# Altium PCB ACH512识别升级仪V1.2_20260608.PcbDoc (part 3 of 6)
Units mil, origin at the board's own origin, x right, y up, seen from the top; angles counter-clockwise.
Board outline 6141.73 x 5401.57 mil, 2 copper layers (Top Layer, Bottom Layer); 157 components, 111 nets, 548 pads, 222 vias.
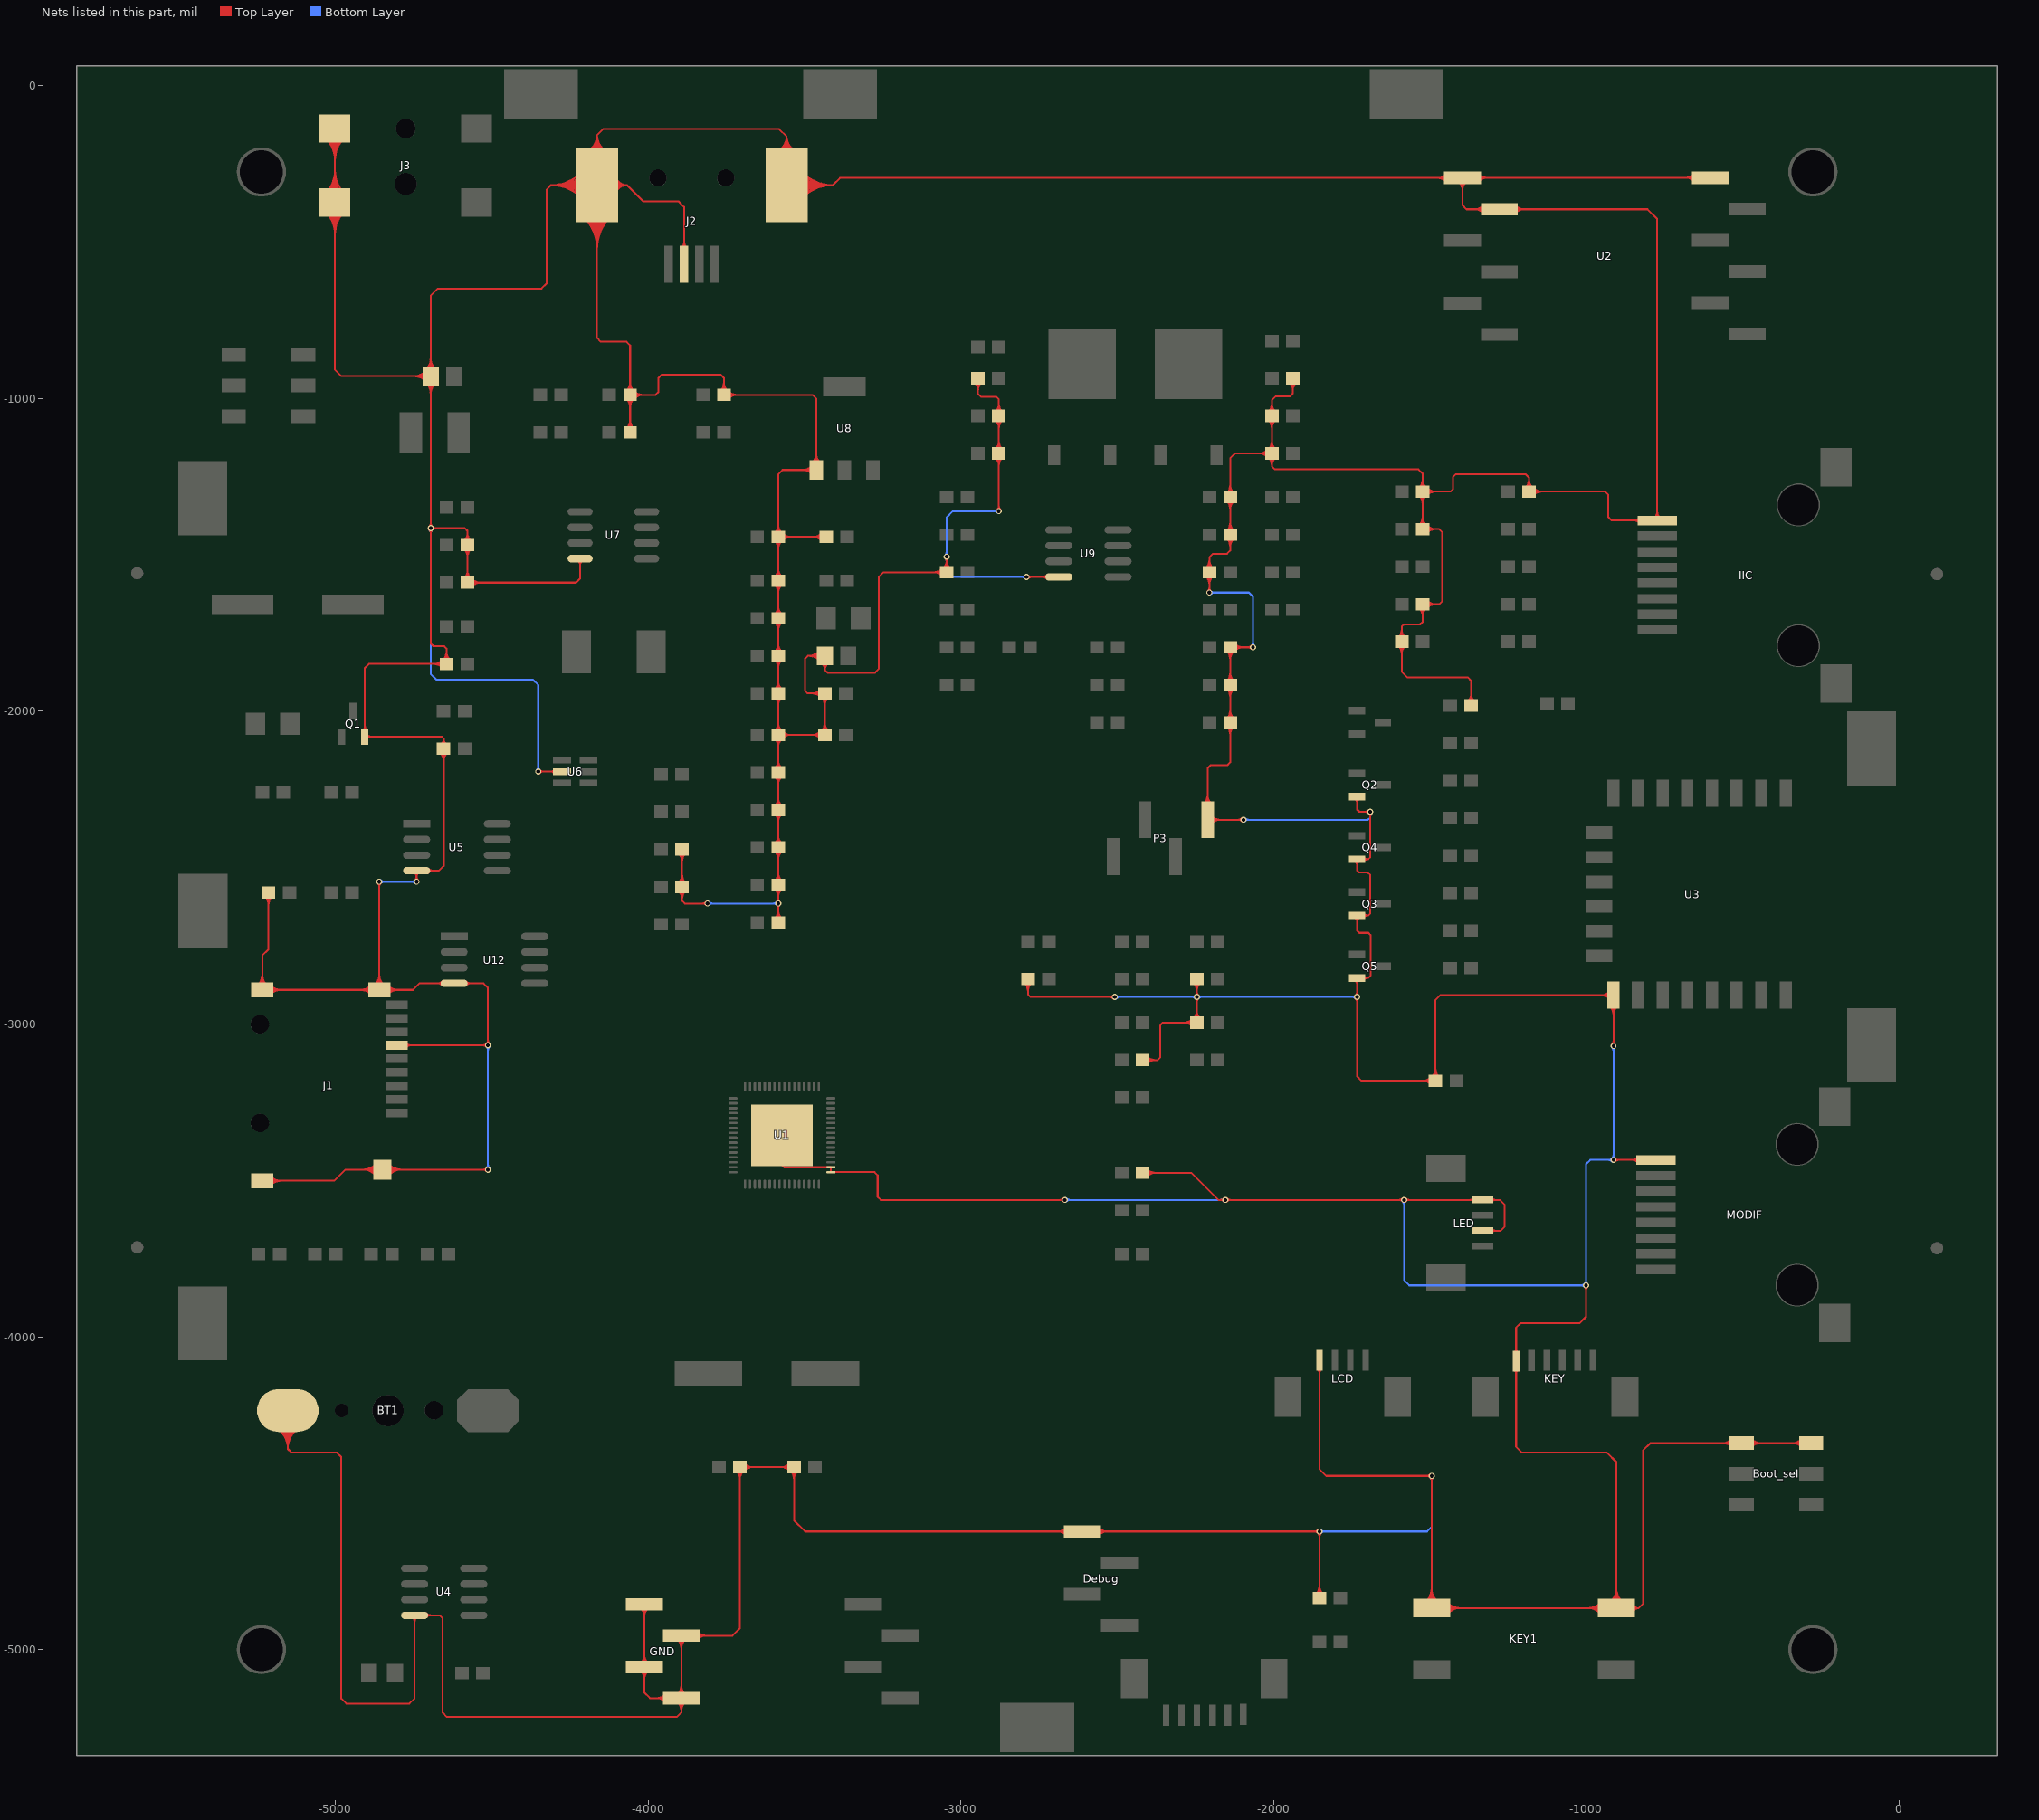
[diagram p3: the nets of this part, all layers, seen from the top]

## Via types
v1: diameter 19.68, hole 11.81, Top Layer to Bottom Layer, 222 vias

## Nets (pads, with @x,y where several pads share a name; then routed paths per layer and width w, separated by ;. In a path a pad name is that pad's centre, name@x,y a point inside that pad or via, vN(x,y) a via of type N, cw(c..) or ccw(c..) an arc to the next point about the centre after c; other vN are vias at no path point) (continued)
GND: (continued)
  Top Layer w6: J1.12@-5247.95,-2876.31 ccw(c-5283.15,-2841.11) -5233.37,-2841.11 ccw(c-5183.59,-2841.11) J1.12@-5218.79,-2876.31 ; J1.12@-5243.71,-2880.55 ccw(c-5268.67,-2855.59) -5233.37,-2855.59 ccw(c-5198.07,-2855.59) J1.12@-5223.03,-2880.55 ; J1.13@-5233.37,-3501.13 -5003.35,-3501.13 -4967.91,-3465.69 J1.10@-4849.52,-3465.69 v1(-4511.81,-3465.69) ; C48.1@-5225.26,-2591.8 cw(c-5253.75,-2620.28) -5213.46,-2620.28 cw(c-5173.18,-2620.28) C48.1@-5201.67,-2591.8 ; C48.1@-5221.02,-2587.56 cw(c-5239.26,-2605.8) -5213.46,-2605.8 cw(c-5187.67,-2605.8) C48.1@-5205.91,-2587.56 ; C48.1@-5213.46,-2580 -5213.46,-2761.46 -5233.37,-2781.37 J1.12@-5233.37,-2890.89 J1.11@-4859.36,-2890.89 ; J1.13@-5211.22,-3511.47 cw(c-5186.26,-3536.43) -5186.26,-3501.13 cw(c-5186.26,-3465.83) J1.13@-5211.22,-3490.79 ; J1.12@-5211.22,-2901.23 cw(c-5186.26,-2926.19) -5186.26,-2890.89 cw(c-5186.26,-2855.59) J1.12@-5211.22,-2880.55 ; J1.13@-5206.97,-3515.71 cw(c-5171.77,-3550.91) -5171.77,-3501.13 cw(c-5171.77,-3451.35) J1.13@-5206.97,-3486.55 ; J1.12@-5206.97,-2905.47 cw(c-5171.77,-2940.67) -5171.77,-2890.89 cw(c-5171.77,-2841.11) J1.12@-5206.97,-2876.31 ; BT1.2@-5188.21,-4290.94 cw(c-5232.89,-4358.52) -5151.87,-4358.52 ; BT1.2@-5184.9,-4285.94 cw(c-5225.51,-4347.36) -5151.87,-4347.36 cw(c-5078.24,-4347.36) BT1.2@-5118.84,-4285.94 ; BT1.2@-5181.6,-4280.93 cw(c-5218.13,-4336.2) -5151.87,-4336.2 cw(c-5085.61,-4336.2) BT1.2@-5122.15,-4280.93 ; BT1.2@-5178.29,-4275.92 cw(c-5210.76,-4325.05) -5151.87,-4325.05 cw(c-5092.99,-4325.05) BT1.2@-5125.46,-4275.92 ; BT1.2@-5174.98,-4270.92 cw(c-5203.38,-4313.89) -5151.87,-4313.89 cw(c-5100.37,-4313.89) BT1.2@-5128.77,-4270.92 ; BT1.2@-5151.87,-4235.97 -5151.87,-4358.53 ; BT1.2@-5115.54,-4290.94 ccw(c-5070.86,-4358.52) -5151.87,-4358.52 ; J3.4@-5030.92,-402.96 cw(c-5103.08,-475.13) -5001.02,-475.13 cw(c-4898.96,-475.13) J3.4@-4971.13,-402.96 ; J3.4@-5030.92,-343.18 ccw(c-5103.08,-271.01) -5001.02,-271.01 ccw(c-4898.96,-271.01) J3.4@-4971.13,-343.18 ; J3.4@-5030.92,-166.74 cw(c-5103.08,-238.91) -5001.02,-238.91 cw(c-4898.96,-238.91) J3.4@-4971.13,-166.74 ; J3.4@-5026.67,-398.72 cw(c-5088.6,-460.65) -5001.02,-460.65 cw(c-4913.44,-460.65) J3.4@-4975.37,-398.72 ; J3.4@-5026.67,-347.42 ccw(c-5088.6,-285.49) -5001.02,-285.49 ccw(c-4913.44,-285.49) J3.4@-4975.37,-347.42 ; J3.4@-5026.67,-162.5 cw(c-5088.6,-224.43) -5001.02,-224.43 cw(c-4913.44,-224.43) J3.4@-4975.37,-162.5 ; J3.4@-5022.43,-394.48 cw(c-5074.11,-446.16) -5001.02,-446.16 cw(c-4927.93,-446.16) J3.4@-4979.61,-394.48 ; J3.4@-5022.43,-351.66 ccw(c-5074.11,-299.98) -5001.02,-299.98 ccw(c-4927.93,-299.98) J3.4@-4979.61,-351.66 ; J3.4@-5022.43,-158.26 cw(c-5074.11,-209.94) -5001.02,-209.94 cw(c-4927.93,-209.94) J3.4@-4979.61,-158.26 ; J3.4@-5018.19,-390.24 cw(c-5059.63,-431.68) -5001.02,-431.68 cw(c-4942.42,-431.68) J3.4@-4983.86,-390.24 ; J3.4@-5018.19,-355.9 ccw(c-5059.63,-314.46) -5001.02,-314.46 ccw(c-4942.42,-314.46) J3.4@-4983.86,-355.9 ; J3.4@-5018.19,-154.02 cw(c-5059.63,-195.46) -5001.02,-195.46 cw(c-4942.42,-195.46) J3.4@-4983.86,-154.02 ; J3.4@-5001.02,-136.85 J3.4@-5001.02,-373.07 -5001.02,-908.38 -4980.81,-928.59 C15.2@-4694.81,-928.59 ; Q1.2@-4911.66,-2061.33 ccw(c-4926.7,-2046.29) -4905.43,-2046.29 ccw(c-4884.16,-2046.29) Q1.2@-4899.2,-2061.33 ; Q1.2@-4899.2,-2087.57 cw(c-4884.16,-2102.61) -4884.16,-2081.34 cw(c-4884.16,-2060.07) Q1.2@-4899.2,-2075.11 ; J1.11@-4885.76,-2905.47 ccw(c-4920.96,-2940.67) -4920.96,-2890.89 ccw(c-4920.96,-2841.11) J1.11@-4885.76,-2876.31 ; J1.11@-4881.51,-2901.23 ccw(c-4906.47,-2926.19) -4906.47,-2890.89 ccw(c-4906.47,-2855.59) J1.11@-4881.51,-2880.55 ; J1.11@-4873.94,-2876.31 ccw(c-4909.14,-2841.11) -4859.36,-2841.11 ccw(c-4809.58,-2841.11) J1.11@-4844.78,-2876.31 ; J1.11@-4869.7,-2880.55 ccw(c-4894.66,-2855.59) -4859.36,-2855.59 ccw(c-4824.06,-2855.59) J1.11@-4849.02,-2880.55 ; J1.10@-4868.28,-3484.45 ccw(c-4913.57,-3529.74) -4913.57,-3465.69 ccw(c-4913.57,-3401.64) J1.10@-4868.28,-3446.93 ; v1@-4864.2,-2549.84 cw(c-4875.88,-2561.52) -4859.36,-2561.52 cw(c-4842.84,-2561.52) v1@-4854.52,-2549.84 ; J1.10@-4864.04,-3480.21 ccw(c-4899.08,-3515.25) -4899.08,-3465.69 ccw(c-4899.08,-3416.13) J1.10@-4864.04,-3451.17 ; J1.10@-4859.79,-3475.96 ccw(c-4884.6,-3500.77) -4884.6,-3465.69 ccw(c-4884.6,-3430.61) J1.10@-4859.79,-3455.42 ; v1(-4859.36,-2545) J1.11@-4859.36,-2890.89 ; J1.10@-4839.25,-3475.96 cw(c-4814.44,-3500.77) -4814.44,-3465.69 cw(c-4814.44,-3430.61) J1.10@-4839.25,-3455.42 ; J1.11@-4837.21,-2901.23 cw(c-4812.25,-2926.19) -4812.25,-2890.89 cw(c-4812.25,-2855.59) J1.11@-4837.21,-2880.55 ; J1.10@-4835,-3480.21 cw(c-4799.96,-3515.25) -4799.96,-3465.69 cw(c-4799.96,-3416.13) J1.10@-4835,-3451.17 ; J1.11@-4832.96,-2905.47 cw(c-4797.76,-2940.67) -4797.76,-2890.89 cw(c-4797.76,-2841.11) J1.11@-4832.96,-2876.31 ; J1.10@-4830.76,-3484.45 cw(c-4785.47,-3529.74) -4785.47,-3465.69 cw(c-4785.47,-3401.64) J1.10@-4830.76,-3446.93 ; J1.6@-4804.24,-3068.05 v1(-4511.81,-3068.05) -4511.81,-2884.19 -4526,-2870 U12.4@-4620,-2870 -4731,-2870 -4751.89,-2890.89 J1.11@-4859.36,-2890.89 ; J1.6@-4774.96,-3075.67 cw(c-4756.56,-3094.08) -4756.56,-3068.05 cw(c-4756.56,-3042.02) J1.6@-4774.96,-3060.43 ; U4.4@-4752.53,-4896.82 cw(c-4767.57,-4911.86) -4746.3,-4911.86 cw(c-4725.03,-4911.86) U4.4@-4740.07,-4896.82 ; U5.4@-4746.23,-2516.23 cw(c-4761.27,-2531.27) -4740,-2531.27 cw(c-4718.73,-2531.27) U5.4@-4733.77,-2516.23 ; v1@-4744.84,-2540.16 ccw(c-4756.52,-2528.48) -4740,-2528.48 ccw(c-4723.48,-2528.48) v1@-4735.16,-2540.16 ; v1(-4740,-2545) U5.4@-4740,-2510 -4669,-2510 -4653.46,-2494.46 C11.2@-4653.46,-2120 -4653.46,-2087.54 ; C15.2@-4710.79,-948.5 cw(c-4749.35,-987.07) -4694.81,-987.07 cw(c-4640.27,-987.07) C15.2@-4678.84,-948.5 ; C15.2@-4710.79,-944.56 ccw(c-4749.35,-983.13) -4749.35,-928.59 ccw(c-4749.35,-874.05) C15.2@-4710.79,-912.62 ; C15.2@-4710.79,-908.68 ccw(c-4749.35,-870.11) -4694.81,-870.11 ccw(c-4640.27,-870.11) C15.2@-4678.84,-908.68 ; U4.4@-4708.57,-4896.82 cw(c-4693.53,-4911.86) -4693.53,-4890.59 cw(c-4693.53,-4869.32) U4.4@-4708.57,-4884.36 ; C15.2@-4706.54,-944.26 cw(c-4734.86,-972.58) -4694.81,-972.58 cw(c-4654.76,-972.58) C15.2@-4683.08,-944.26 ; C15.2@-4706.54,-940.32 ccw(c-4734.86,-968.64) -4734.86,-928.59 ccw(c-4734.86,-888.54) C15.2@-4706.54,-916.86 ; C15.2@-4706.54,-912.92 ccw(c-4734.86,-884.6) -4694.81,-884.6 ccw(c-4654.76,-884.6) C15.2@-4683.08,-912.92 ; U5.4@-4702.27,-2516.23 cw(c-4687.23,-2531.27) -4687.23,-2510 cw(c-4687.23,-2488.73) U5.4@-4702.27,-2503.77 ; v1@-4699.65,-1419.43 cw(c-4711.33,-1431.11) -4694.81,-1431.11 cw(c-4678.29,-1431.11) -4689.97,-1419.43 cw(c-4678.29,-1431.11) -4678.29,-1414.59 cw(c-4678.29,-1398.07) -4689.97,-1409.75 cw(c-4678.29,-1398.07) -4694.81,-1398.07 cw(c-4711.33,-1398.07) v1@-4699.65,-1409.75 ; C11.2@-4665.26,-2131.8 cw(c-4693.75,-2160.28) -4653.46,-2160.28 cw(c-4613.18,-2160.28) C11.2@-4641.67,-2131.8 ; C11.2@-4663.18,-2106.43 ccw(c-4676.7,-2087.54) -4653.46,-2087.54 ; C11.2@-4661.02,-2127.56 cw(c-4679.26,-2145.8) -4653.46,-2145.8 cw(c-4627.67,-2145.8) C11.2@-4645.91,-2127.56 ; C11.2@-4659.68,-2111.31 ccw(c-4668.35,-2099.21) -4653.46,-2099.21 ccw(c-4638.58,-2099.21) C11.2@-4647.25,-2111.31 ; R18.2@-4658.04,-1860.39 ccw(c-4686.52,-1888.87) -4686.52,-1848.59 ccw(c-4686.52,-1808.31) R18.2@-4658.04,-1836.79 ; U12.4@-4657.73,-2876.23 ccw(c-4672.77,-2891.27) -4672.77,-2870 ccw(c-4672.77,-2848.73) U12.4@-4657.73,-2863.77 ; R18.2@-4656.07,-1836.79 ccw(c-4684.56,-1808.31) -4644.27,-1808.31 ccw(c-4603.99,-1808.31) R18.2@-4632.48,-1836.79 ; R18.2@-4653.8,-1856.15 ccw(c-4672.04,-1874.39) -4672.04,-1848.59 ccw(c-4672.04,-1822.79) R18.2@-4653.8,-1841.03 ; R18.2@-4651.83,-1841.03 ccw(c-4670.07,-1822.79) -4644.27,-1822.79 ccw(c-4618.48,-1822.79) R18.2@-4636.72,-1841.03 ; C11.2@-4643.75,-2106.43 cw(c-4630.23,-2087.54) -4653.46,-2087.54 ; C20.2@-4589.14,-1576.79 ccw(c-4617.63,-1548.31) -4577.35,-1548.31 ccw(c-4537.06,-1548.31) C20.2@-4565.55,-1576.79 ; C21.2@-4589.14,-1480.39 cw(c-4617.63,-1508.87) -4577.35,-1508.87 cw(c-4537.06,-1508.87) C21.2@-4565.55,-1480.39 ; C21.2@-4589.14,-1456.79 ccw(c-4617.63,-1428.31) -4577.35,-1428.31 ccw(c-4537.06,-1428.31) C21.2@-4565.55,-1456.79 ; C20.2@-4584.9,-1581.03 ccw(c-4603.14,-1562.79) -4577.35,-1562.79 ccw(c-4551.55,-1562.79) C20.2@-4569.79,-1581.03 ; C21.2@-4584.9,-1476.15 cw(c-4603.14,-1494.39) -4577.35,-1494.39 cw(c-4551.55,-1494.39) C21.2@-4569.79,-1476.15 ; C21.2@-4584.9,-1461.03 ccw(c-4603.14,-1442.79) -4577.35,-1442.79 ccw(c-4551.55,-1442.79) C21.2@-4569.79,-1461.03 ; U12.4@-4582.27,-2876.23 cw(c-4567.23,-2891.27) -4567.23,-2870 cw(c-4567.23,-2848.73) U12.4@-4582.27,-2863.77 ; C20.2@-4567.82,-1596.15 cw(c-4549.58,-1614.39) -4549.58,-1588.59 cw(c-4549.58,-1562.79) C20.2@-4567.82,-1581.03 ; C20.2@-4563.58,-1600.39 cw(c-4535.1,-1628.87) -4535.1,-1588.59 cw(c-4535.1,-1548.31) C20.2@-4563.58,-1576.79 ; v1@-4516.65,-3470.53 ccw(c-4528.33,-3482.21) -4528.33,-3465.69 ccw(c-4528.33,-3449.17) v1@-4516.65,-3460.85 ; v1@-4516.65,-3072.89 ccw(c-4528.33,-3084.57) -4528.33,-3068.05 ccw(c-4528.33,-3051.53) -4516.65,-3063.21 ccw(c-4528.33,-3051.53) -4511.81,-3051.53 ccw(c-4495.29,-3051.53) v1@-4506.97,-3063.21 ; v1(-4351.09,-2192.91) U6.2@-4275.13,-2192.91 ; v1@-4346.25,-2197.75 cw(c-4334.57,-2209.43) -4334.57,-2192.91 cw(c-4334.57,-2176.39) v1@-4346.25,-2188.07 ; U6.2@-4298.38,-2198.45 ccw(c-4311.74,-2211.81) -4311.74,-2192.91 ccw(c-4311.74,-2174.02) U6.2@-4298.38,-2187.38 ; U7.4@-4223.47,-1518.37 cw(c-4238.84,-1533.74) -4217.11,-1533.74 cw(c-4195.38,-1533.74) U7.4@-4210.75,-1518.37 ; U7.4@-4217.11,-1512.01 -4217.11,-1575.89 -4229.81,-1588.59 C20.2@-4577.35,-1588.59 C21.2@-4577.35,-1468.59 -4577.35,-1423.05 -4585.81,-1414.59 v1(-4694.81,-1414.59) ; J2.6@-4209.94,-361.35 ccw(c-4310.01,-454.5) -4310.01,-317.79 ; J2.6@-4209.94,-274.23 cw(c-4310.01,-181.08) -4310.01,-317.79 ; J2.6@-4208.35,-414.97 cw(c-4317.49,-524.1) -4163.15,-524.1 cw(c-4008.81,-524.1) J2.6@-4117.95,-414.97 ; J2.6@-4205.55,-357.27 ccw(c-4296.22,-441.67) -4296.22,-317.79 ccw(c-4296.22,-193.91) J2.6@-4205.55,-278.32 ; J2.6@-4204.11,-410.72 cw(c-4303,-509.62) -4163.15,-509.62 cw(c-4023.3,-509.62) J2.6@-4122.19,-410.72 ; J2.6@-4201.16,-353.18 ccw(c-4282.44,-428.84) -4282.44,-317.79 ccw(c-4282.44,-206.75) J2.6@-4201.16,-282.41 ; J2.6@-4199.87,-406.48 cw(c-4288.52,-495.13) -4163.15,-495.13 cw(c-4037.78,-495.13) J2.6@-4126.43,-406.48 ; J2.6@-4196.77,-349.09 ccw(c-4268.66,-416.01) -4268.66,-317.79 ccw(c-4268.66,-219.58) J2.6@-4196.77,-286.5 ; J2.6@-4195.63,-402.24 cw(c-4274.03,-480.65) -4163.15,-480.65 cw(c-4052.27,-480.65) J2.6@-4130.67,-402.24 ; J2.6@-4193.85,-209.75 ccw(c-4222.23,-157.93) -4163.15,-157.93 ; J2.6@-4192.38,-345 ccw(c-4254.87,-403.18) -4254.87,-317.79 ccw(c-4254.87,-232.41) J2.6@-4192.38,-290.59 ; J2.6@-4191.38,-398 cw(c-4259.55,-466.16) -4163.15,-466.16 cw(c-4066.75,-466.16) J2.6@-4134.92,-398 ; J2.6@-4190.97,-215.02 ccw(c-4216.68,-168.06) -4163.15,-168.06 ccw(c-4109.62,-168.06) J2.6@-4135.33,-215.02 ; J2.6@-4188.09,-220.28 ccw(c-4211.14,-178.19) -4163.15,-178.19 ccw(c-4115.16,-178.19) J2.6@-4138.21,-220.28 ; J2.6@-4187.98,-340.91 ccw(c-4241.09,-390.35) -4241.09,-317.79 ccw(c-4241.09,-245.24) J2.6@-4187.98,-294.68 ; J2.6@-4187.14,-393.75 cw(c-4245.06,-451.67) -4163.15,-451.67 cw(c-4081.24,-451.67) J2.6@-4139.16,-393.75 ; J2.6@-4185.21,-225.54 ccw(c-4205.59,-188.31) -4163.15,-188.31 ccw(c-4120.71,-188.31) J2.6@-4141.09,-225.54 ; J2.6@-4182.9,-389.51 cw(c-4230.58,-437.19) -4163.15,-437.19 cw(c-4095.72,-437.19) J2.6@-4143.4,-389.51 ; J2.6@-4182.33,-230.8 ccw(c-4200.05,-198.44) -4163.15,-198.44 ccw(c-4126.25,-198.44) J2.6@-4143.97,-230.8 ; J2.6@-4132.45,-209.75 cw(c-4104.07,-157.93) -4163.15,-157.93 ; J2.6@-4120.69,-335.31 cw(c-4094.51,-346.12) -4094.51,-317.79 cw(c-4094.51,-289.47) J2.6@-4120.69,-300.27 ; J2.6@-4115.15,-337.6 cw(c-4085.54,-349.82) -4085.54,-317.79 cw(c-4085.54,-285.77) J2.6@-4115.15,-297.98 ; J2.6@-4109.6,-339.89 cw(c-4076.58,-353.52) -4076.58,-317.79 cw(c-4076.58,-282.07) J2.6@-4109.6,-295.7 ; J2.6@-4104.06,-342.18 cw(c-4067.61,-357.22) -4067.61,-317.79 ; J2.6@-4104.06,-293.41 ccw(c-4067.61,-278.37) -4067.61,-317.79 ; C16.2@-4069.14,-1096.79 ccw(c-4097.63,-1068.31) -4057.35,-1068.31 ccw(c-4017.06,-1068.31) C16.2@-4045.55,-1096.79 ; D3.2@-4069.14,-1000.39 cw(c-4097.63,-1028.87) -4057.35,-1028.87 cw(c-4017.06,-1028.87) D3.2@-4045.55,-1000.39 ; D3.2@-4069.14,-976.79 ccw(c-4097.63,-948.31) -4057.35,-948.31 ccw(c-4017.06,-948.31) D3.2@-4045.55,-976.79 ; C16.2@-4064.9,-1101.03 ccw(c-4083.14,-1082.79) -4057.35,-1082.79 ccw(c-4031.55,-1082.79) C16.2@-4049.79,-1101.03 ; D3.2@-4064.9,-996.15 cw(c-4083.14,-1014.39) -4057.35,-1014.39 cw(c-4031.55,-1014.39) D3.2@-4049.79,-996.15 ; D3.2@-4064.9,-981.03 ccw(c-4083.14,-962.79) -4057.35,-962.79 ccw(c-4031.55,-962.79) D3.2@-4049.79,-981.03 ; C16.2@-4057.35,-1108.59 D3.2@-4057.35,-988.59 ; D3.2@-4047.82,-996.15 cw(c-4029.58,-1014.39) -4029.58,-988.59 cw(c-4029.58,-962.79) D3.2@-4047.82,-981.03 ; D3.2@-4043.58,-1000.39 cw(c-4015.1,-1028.87) -4015.1,-988.59 cw(c-4015.1,-948.31) D3.2@-4043.58,-976.79 ; GND.3@-4023.89,-5067.67 cw(c-4053.04,-5096.82) -4011.81,-5096.82 cw(c-3970.58,-5096.82) GND.3@-3999.73,-5067.67 ; GND.3@-4023.89,-5043.51 ccw(c-4053.04,-5014.36) -4011.81,-5014.36 ccw(c-3970.58,-5014.36) GND.3@-3999.73,-5043.51 ; GND.1@-4023.89,-4867.67 cw(c-4053.04,-4896.82) -4011.81,-4896.82 cw(c-3970.58,-4896.82) GND.1@-3999.73,-4867.67 ; GND.3@-4019.64,-5063.42 cw(c-4038.56,-5082.34) -4011.81,-5082.34 cw(c-3985.06,-5082.34) GND.3@-4003.98,-5063.42 ; GND.3@-4019.64,-5047.76 ccw(c-4038.56,-5028.84) -4011.81,-5028.84 ccw(c-3985.06,-5028.84) GND.3@-4003.98,-5047.76 ; GND.1@-4019.64,-4863.42 cw(c-4038.56,-4882.34) -4011.81,-4882.34 cw(c-3985.06,-4882.34) GND.1@-4003.98,-4863.42 ; GND.1@-4011.81,-4855.59 GND.3@-4011.81,-5055.59 -4011.81,-5137.59 -3993.81,-5155.59 GND.4@-3893.7,-5155.59 ; GND.4@-3944.75,-5167.67 ccw(c-3973.91,-5196.82) -3973.91,-5155.59 ccw(c-3973.91,-5114.36) GND.4@-3944.75,-5143.51 ; GND.4@-3940.51,-5163.42 ccw(c-3959.42,-5182.34) -3959.42,-5155.59 ccw(c-3959.42,-5128.84) GND.4@-3940.51,-5147.76 ; GND.4@-3905.78,-5167.67 cw(c-3934.93,-5196.82) -3893.7,-5196.82 cw(c-3852.47,-5196.82) GND.4@-3881.62,-5167.67 ; GND.4@-3905.78,-5143.51 ccw(c-3934.93,-5114.36) -3893.7,-5114.36 ccw(c-3852.47,-5114.36) GND.4@-3881.62,-5143.51 ; GND.2@-3905.78,-4967.67 cw(c-3934.93,-4996.82) -3893.7,-4996.82 cw(c-3852.47,-4996.82) GND.2@-3881.62,-4967.67 ; C10.1@-3903.14,-2573.39 cw(c-3931.63,-2601.87) -3891.35,-2601.87 cw(c-3851.06,-2601.87) C10.1@-3879.55,-2573.39 ; C10.1@-3903.14,-2549.79 ccw(c-3931.63,-2521.31) -3891.35,-2521.31 ccw(c-3851.06,-2521.31) C10.1@-3879.55,-2549.79 ; C12.2@-3903.14,-2453.39 cw(c-3931.63,-2481.87) -3891.35,-2481.87 cw(c-3851.06,-2481.87) C12.2@-3879.55,-2453.39 ; GND.4@-3901.53,-5163.42 cw(c-3920.45,-5182.34) -3893.7,-5182.34 cw(c-3866.95,-5182.34) GND.4@-3885.87,-5163.42 ; GND.4@-3901.53,-5147.76 ccw(c-3920.45,-5128.84) -3893.7,-5128.84 ccw(c-3866.95,-5128.84) GND.4@-3885.87,-5147.76 ; GND.2@-3901.53,-4963.42 cw(c-3920.45,-4982.34) -3893.7,-4982.34 cw(c-3866.95,-4982.34) GND.2@-3885.87,-4963.42 ; C10.1@-3898.9,-2569.15 cw(c-3917.14,-2587.39) -3891.35,-2587.39 cw(c-3865.55,-2587.39) C10.1@-3883.79,-2569.15 ; C10.1@-3898.9,-2554.03 ccw(c-3917.14,-2535.79) -3891.35,-2535.79 ccw(c-3865.55,-2535.79) C10.1@-3883.79,-2554.03 ; C12.2@-3898.9,-2449.15 cw(c-3917.14,-2467.39) -3891.35,-2467.39 cw(c-3865.55,-2467.39) C12.2@-3883.79,-2449.15 ; J2.4@-3892.23,-517.65 ccw(c-3910.63,-499.25) -3884.61,-499.25 ccw(c-3858.58,-499.25) J2.4@-3876.98,-517.65 ; C12.2@-3891.35,-2441.59 C10.1@-3891.35,-2561.59 -3891.35,-2606.05 -3882.81,-2614.59 v1(-3809.81,-2614.59) ; J2.4@-3884.61,-570.55 -3884.61,-387.79 -3902.81,-369.59 -4015.81,-369.59 -4067.61,-317.79 ; GND.2@-3846.89,-4963.42 cw(c-3827.98,-4982.34) -3827.98,-4955.59 cw(c-3827.98,-4928.84) GND.2@-3846.89,-4947.76 ; GND.2@-3842.65,-4967.67 cw(c-3813.49,-4996.82) -3813.49,-4955.59 cw(c-3813.49,-4914.36) GND.2@-3842.65,-4943.51 ; v1@-3814.65,-2619.43 ccw(c-3826.33,-2631.11) -3826.33,-2614.59 ccw(c-3826.33,-2598.07) v1@-3814.65,-2609.75 ; R17.1@-3769.14,-976.79 ccw(c-3797.63,-948.31) -3757.35,-948.31 ccw(c-3717.06,-948.31) R17.1@-3745.55,-976.79 ; R17.1@-3764.9,-981.03 ccw(c-3783.14,-962.79) -3757.35,-962.79 ccw(c-3731.55,-962.79) R17.1@-3749.79,-981.03 ; R17.1@-3747.82,-996.15 cw(c-3729.58,-1014.39) -3729.58,-988.59 cw(c-3729.58,-962.79) R17.1@-3747.82,-981.03 ; R17.1@-3743.58,-1000.39 cw(c-3715.1,-1028.87) -3715.1,-988.59 cw(c-3715.1,-948.31) R17.1@-3743.58,-976.79 ; C1.2@-3718.14,-4428.39 cw(c-3746.63,-4456.87) -3706.35,-4456.87 cw(c-3666.06,-4456.87) C1.2@-3694.55,-4428.39 ; C1.2@-3713.9,-4424.15 cw(c-3732.14,-4442.39) -3706.35,-4442.39 cw(c-3680.55,-4442.39) C1.2@-3698.79,-4424.15 ; C1.2@-3696.82,-4424.15 cw(c-3678.58,-4442.39) -3678.58,-4416.59 cw(c-3678.58,-4390.79) C1.2@-3696.82,-4409.03 ; C1.2@-3692.58,-4428.39 cw(c-3664.1,-4456.87) -3664.1,-4416.59 cw(c-3664.1,-4376.31) C1.2@-3692.58,-4404.79 ; C9.1@-3595.61,-2663.79 ccw(c-3624.09,-2635.31) -3583.81,-2635.31 ccw(c-3543.53,-2635.31) C9.1@-3572.01,-2663.79 ; C8.1@-3595.61,-2567.39 cw(c-3624.09,-2595.87) -3583.81,-2595.87 cw(c-3543.53,-2595.87) C8.1@-3572.01,-2567.39 ; C8.1@-3595.61,-2543.79 ccw(c-3624.09,-2515.31) -3583.81,-2515.31 ccw(c-3543.53,-2515.31) C8.1@-3572.01,-2543.79 ; C14.2@-3595.61,-2447.39 cw(c-3624.09,-2475.87) -3583.81,-2475.87 cw(c-3543.53,-2475.87) C14.2@-3572.01,-2447.39 ; C14.2@-3595.61,-2423.79 ccw(c-3624.09,-2395.31) -3583.81,-2395.31 ccw(c-3543.53,-2395.31) C14.2@-3572.01,-2423.79 ; C13.2@-3595.61,-2327.39 cw(c-3624.09,-2355.87) -3583.81,-2355.87 cw(c-3543.53,-2355.87) C13.2@-3572.01,-2327.39 ; C13.2@-3595.61,-2303.79 ccw(c-3624.09,-2275.31) -3583.81,-2275.31 ccw(c-3543.53,-2275.31) C13.2@-3572.01,-2303.79 ; C5.1@-3595.61,-2207.39 cw(c-3624.09,-2235.87) -3583.81,-2235.87 cw(c-3543.53,-2235.87) C5.1@-3572.01,-2207.39 ; C5.1@-3595.61,-2183.79 ccw(c-3624.09,-2155.31) -3583.81,-2155.31 ccw(c-3543.53,-2155.31) C5.1@-3572.01,-2183.79 ; C4.1@-3595.61,-2087.39 cw(c-3624.09,-2115.87) -3583.81,-2115.87 cw(c-3543.53,-2115.87) C4.1@-3572.01,-2087.39 ; C4.1@-3595.61,-2063.79 ccw(c-3624.09,-2035.31) -3583.81,-2035.31 ccw(c-3543.53,-2035.31) C4.1@-3572.01,-2063.79 ; C22.2@-3595.61,-1954.39 cw(c-3624.09,-1982.87) -3583.81,-1982.87 cw(c-3543.53,-1982.87) C22.2@-3572.01,-1954.39 ; C22.2@-3595.61,-1930.79 ccw(c-3624.09,-1902.31) -3583.81,-1902.31 ccw(c-3543.53,-1902.31) C22.2@-3572.01,-1930.79 ; C23.2@-3595.61,-1834.39 cw(c-3624.09,-1862.87) -3583.81,-1862.87 cw(c-3543.53,-1862.87) C23.2@-3572.01,-1834.39 ; C23.2@-3595.61,-1810.79 ccw(c-3624.09,-1782.31) -3583.81,-1782.31 ccw(c-3543.53,-1782.31) C23.2@-3572.01,-1810.79 ; C24.2@-3595.61,-1714.39 cw(c-3624.09,-1742.87) -3583.81,-1742.87 cw(c-3543.53,-1742.87) C24.2@-3572.01,-1714.39 ; C24.2@-3595.61,-1690.79 ccw(c-3624.09,-1662.31) -3583.81,-1662.31 ccw(c-3543.53,-1662.31) C24.2@-3572.01,-1690.79 ; C25.2@-3595.61,-1594.39 cw(c-3624.09,-1622.87) -3583.81,-1622.87 cw(c-3543.53,-1622.87) C25.2@-3572.01,-1594.39 ; C25.2@-3595.61,-1570.79 ccw(c-3624.09,-1542.31) -3583.81,-1542.31 ccw(c-3543.53,-1542.31) C25.2@-3572.01,-1570.79 ; C26.2@-3595.61,-1454.39 cw(c-3624.09,-1482.87) -3583.81,-1482.87 cw(c-3543.53,-1482.87) C26.2@-3572.01,-1454.39 ; C26.2@-3595.61,-1430.79 ccw(c-3624.09,-1402.31) -3583.81,-1402.31 ccw(c-3543.53,-1402.31) C26.2@-3572.01,-1430.79 ; C9.1@-3591.37,-2668.03 ccw(c-3609.61,-2649.79) -3583.81,-2649.79 ccw(c-3558.02,-2649.8) C9.1@-3576.26,-2668.03 ; C8.1@-3591.37,-2563.15 cw(c-3609.61,-2581.39) -3583.81,-2581.39 cw(c-3558.01,-2581.39) C8.1@-3576.26,-2563.15 ; C8.1@-3591.37,-2548.03 ccw(c-3609.61,-2529.79) -3583.81,-2529.79 ccw(c-3558.01,-2529.79) C8.1@-3576.26,-2548.03 ; C14.2@-3591.37,-2443.15 cw(c-3609.61,-2461.39) -3583.81,-2461.39 cw(c-3558.01,-2461.39) C14.2@-3576.25,-2443.15 ; C14.2@-3591.37,-2428.03 ccw(c-3609.61,-2409.79) -3583.81,-2409.79 ccw(c-3558.01,-2409.79) C14.2@-3576.25,-2428.03 ; C13.2@-3591.37,-2323.15 cw(c-3609.61,-2341.39) -3583.81,-2341.39 cw(c-3558.01,-2341.39) C13.2@-3576.25,-2323.15 ; C13.2@-3591.37,-2308.03 ccw(c-3609.61,-2289.79) -3583.81,-2289.79 ccw(c-3558.01,-2289.79) C13.2@-3576.25,-2308.03 ; C5.1@-3591.37,-2203.15 cw(c-3609.61,-2221.39) -3583.81,-2221.39 cw(c-3558.01,-2221.39) C5.1@-3576.26,-2203.15 ; C5.1@-3591.37,-2188.03 ccw(c-3609.61,-2169.79) -3583.81,-2169.79 ccw(c-3558.01,-2169.79) C5.1@-3576.26,-2188.03 ; C4.1@-3591.37,-2083.15 cw(c-3609.61,-2101.39) -3583.81,-2101.39 ; C4.1@-3591.37,-2068.03 ccw(c-3609.61,-2049.79) -3583.81,-2049.79 ccw(c-3558.02,-2049.8) C4.1@-3576.26,-2068.03 ; C22.2@-3591.37,-1950.15 cw(c-3609.61,-1968.39) -3583.81,-1968.39 cw(c-3558.01,-1968.39) C22.2@-3576.25,-1950.15 ; C22.2@-3591.37,-1935.03 ccw(c-3609.61,-1916.79) -3583.81,-1916.79 ccw(c-3558.01,-1916.79) C22.2@-3576.25,-1935.03 ; C23.2@-3591.37,-1830.15 cw(c-3609.61,-1848.39) -3583.81,-1848.39 cw(c-3558.01,-1848.39) C23.2@-3576.25,-1830.15 ; C23.2@-3591.37,-1815.03 ccw(c-3609.61,-1796.79) -3583.81,-1796.79 ccw(c-3558.01,-1796.79) C23.2@-3576.25,-1815.03 ; C24.2@-3591.37,-1710.15 cw(c-3609.61,-1728.39) -3583.81,-1728.39 cw(c-3558.01,-1728.39) C24.2@-3576.25,-1710.15 ; C24.2@-3591.37,-1695.03 ccw(c-3609.61,-1676.79) -3583.81,-1676.79 ccw(c-3558.01,-1676.79) C24.2@-3576.25,-1695.03 ; C25.2@-3591.37,-1590.15 cw(c-3609.61,-1608.39) -3583.81,-1608.39 cw(c-3558.01,-1608.39) C25.2@-3576.25,-1590.15 ; C25.2@-3591.37,-1575.03 ccw(c-3609.61,-1556.79) -3583.81,-1556.79 ccw(c-3558.01,-1556.79) C25.2@-3576.25,-1575.03 ; C26.2@-3591.37,-1450.15 cw(c-3609.61,-1468.39) -3583.81,-1468.39 cw(c-3558.01,-1468.39) C26.2@-3576.25,-1450.15 ; C26.2@-3591.37,-1435.03 ccw(c-3609.61,-1416.79) -3583.81,-1416.79 ccw(c-3558.01,-1416.79) C26.2@-3576.25,-1435.03 ; v1@-3588.65,-2619.43 cw(c-3600.33,-2631.11) -3583.81,-2631.11 cw(c-3567.29,-2631.11) v1@-3578.97,-2619.43 ; v1@-3588.65,-2609.75 ccw(c-3600.33,-2598.07) -3583.81,-2598.07 ccw(c-3567.29,-2598.07) v1@-3578.97,-2609.75 ; J2.5@-3585.36,-208.6 ccw(c-3608.3,-162.55) -3556.85,-162.55 ; C9.1@-3583.81,-2675.59 C4.1@-3583.81,-2075.59 ; -3583.81,-2101.38 cw(c-3558.02,-2101.38) C4.1@-3576.26,-2083.15 ; J2.5@-3582.68,-213.97 ccw(c-3603.47,-172.25) -3556.85,-172.25 ccw(c-3510.23,-172.25) J2.5@-3531.02,-213.97 ; J2.5@-3580.01,-219.35 ccw(c-3598.64,-181.94) -3556.85,-181.94 ccw(c-3515.06,-181.94) J2.5@-3533.69,-219.35 ; J2.5@-3577.33,-224.72 ccw(c-3593.81,-191.63) -3556.85,-191.63 ccw(c-3519.89,-191.63) J2.5@-3536.37,-224.72 ; C4.1@-3574.29,-2083.15 cw(c-3556.05,-2101.39) -3556.05,-2075.59 cw(c-3556.05,-2049.79) C4.1@-3574.29,-2068.03 ; C26.2@-3574.29,-1450.15 cw(c-3556.05,-1468.39) -3556.05,-1442.59 cw(c-3556.05,-1416.79) C26.2@-3574.29,-1435.03 ; U1.0@-3571.81,-3355.59 -3571.81,-3450.59 -3564.45,-3457.95 U1.34@-3415.31,-3457.95 U1.33@-3415.31,-3473.7 -3275.7,-3473.7 -3265.81,-3483.59 -3265.81,-3552.59 -3256.07,-3562.33 v1(-2667.07,-3562.33) ; C4.1@-3570.04,-2087.39 cw(c-3541.56,-2115.87) -3541.56,-2075.59 cw(c-3541.56,-2035.31) C4.1@-3570.04,-2063.79 ; C26.2@-3570.04,-1454.39 cw(c-3541.56,-1482.87) -3541.56,-1442.59 cw(c-3541.56,-1402.31) C26.2@-3570.04,-1430.79 ; C2.2@-3547.04,-4428.39 ccw(c-3575.52,-4456.87) -3575.52,-4416.59 ccw(c-3575.52,-4376.31) C2.2@-3547.04,-4404.79 ; C2.2@-3545.07,-4428.39 cw(c-3573.56,-4456.87) -3533.27,-4456.87 cw(c-3492.99,-4456.87) C2.2@-3521.48,-4428.39 ; C2.2@-3542.8,-4424.15 ccw(c-3561.04,-4442.39) -3561.04,-4416.59 ccw(c-3561.04,-4390.79) C2.2@-3542.8,-4409.03 ; C2.2@-3540.83,-4424.15 cw(c-3559.07,-4442.39) -3533.27,-4442.39 cw(c-3507.48,-4442.39) C2.2@-3525.72,-4424.15 ; J2.5@-3532.13,-341.03 cw(c-3478.39,-391.54) -3478.39,-317.79 cw(c-3478.39,-244.05) J2.5@-3532.13,-294.56 ; J2.5@-3528.34,-208.6 cw(c-3505.4,-162.55) -3556.85,-162.55 ; J2.5@-3527.76,-345.14 cw(c-3464.52,-404.58) -3464.52,-317.79 cw(c-3464.52,-231.01) J2.5@-3527.76,-290.45 ; J2.5@-3523.38,-349.25 cw(c-3450.65,-417.62) -3450.65,-317.79 cw(c-3450.65,-217.97) J2.5@-3523.38,-286.34 ; J2.5@-3519.01,-353.36 cw(c-3436.77,-430.66) -3436.77,-317.79 cw(c-3436.77,-204.93) J2.5@-3519.01,-282.23 ; J2.5@-3514.64,-357.47 cw(c-3422.9,-443.7) -3422.9,-317.79 cw(c-3422.9,-191.89) J2.5@-3514.64,-278.12 ; J2.5@-3510.27,-361.58 cw(c-3409.02,-456.74) -3409.02,-317.79 ; J2.5@-3510.27,-274.01 ccw(c-3409.02,-178.84) -3409.02,-317.79 ; U8.1@-3475.55,-1241.65 ccw(c-3507.39,-1273.5) -3507.39,-1228.46 ccw(c-3507.39,-1183.43) U8.1@-3475.55,-1215.27 ; U8.1@-3475.55,-1206.42 ccw(c-3507.39,-1174.57) -3462.36,-1174.57 ccw(c-3417.33,-1174.57) U8.1@-3449.17,-1206.42 ; U8.1@-3471.31,-1237.41 ccw(c-3492.91,-1259.01) -3492.91,-1228.46 ccw(c-3492.91,-1197.92) U8.1@-3471.31,-1219.52 ; U8.1@-3471.31,-1210.66 ccw(c-3492.91,-1189.06) -3462.36,-1189.06 ccw(c-3431.81,-1189.06) U8.1@-3453.41,-1210.66 ; C19.2@-3450.73,-1838.48 ccw(c-3488.81,-1876.15) -3488.81,-1822.59 ; C19.2@-3450.73,-1806.7 cw(c-3488.81,-1769.03) -3488.81,-1822.59 ; C7.1@-3448.44,-2087.39 ccw(c-3476.92,-2115.87) -3476.92,-2075.59 ccw(c-3476.92,-2035.31) C7.1@-3448.44,-2063.79 ; C6.1@-3448.44,-1954.39 ccw(c-3476.92,-1982.87) -3476.92,-1942.59 ccw(c-3476.92,-1902.31) C6.1@-3448.44,-1930.79 ; C19.2@-3446.82,-1845.58 cw(c-3460.94,-1867.72) -3434.68,-1867.72 ; C7.1@-3446.47,-2063.79 ccw(c-3474.96,-2035.31) -3434.67,-2035.31 ccw(c-3394.39,-2035.31) C7.1@-3422.88,-2063.79 ; C6.1@-3446.47,-1954.39 cw(c-3474.96,-1982.87) -3434.67,-1982.87 cw(c-3394.39,-1982.87) C6.1@-3422.88,-1954.39 ; C19.2@-3446.47,-1834.26 ccw(c-3474.43,-1861.92) -3474.43,-1822.59 ccw(c-3474.43,-1783.26) C19.2@-3446.47,-1810.92 ; D5.2@-3444.51,-1454.39 ccw(c-3472.99,-1482.87) -3472.99,-1442.59 ccw(c-3472.99,-1402.31) D5.2@-3444.51,-1430.79 ; C7.1@-3444.2,-2083.15 ccw(c-3462.44,-2101.39) -3462.44,-2075.59 ccw(c-3462.44,-2049.79) C7.1@-3444.2,-2068.03 ; C6.1@-3444.2,-1950.15 ccw(c-3462.44,-1968.39) -3462.44,-1942.59 ccw(c-3462.44,-1916.79) C6.1@-3444.2,-1935.03 ; C19.2@-3443.6,-1840.52 cw(c-3453.97,-1856.78) -3434.68,-1856.78 cw(c-3415.39,-1856.78) C19.2@-3425.76,-1840.52 ; C7.1@-3442.23,-2068.03 ccw(c-3460.47,-2049.79) -3434.67,-2049.79 ccw(c-3408.88,-2049.79) C7.1@-3427.12,-2068.03 ; C6.1@-3442.23,-1950.15 cw(c-3460.47,-1968.39) -3434.67,-1968.39 cw(c-3408.88,-1968.39) C6.1@-3427.12,-1950.15 ; D5.2@-3440.26,-1450.15 ccw(c-3458.5,-1468.39) -3458.5,-1442.59 ccw(c-3458.5,-1416.79) D5.2@-3440.26,-1435.03 ; D5.2@-3430.74,-1442.59 C26.2@-3583.81,-1442.59 ; C19.2@-3422.53,-1845.58 ccw(c-3408.41,-1867.72) -3434.68,-1867.72 ; R41.1@-3059.04,-1567.39 ccw(c-3087.52,-1595.87) -3087.52,-1555.59 ccw(c-3087.52,-1515.31) R41.1@-3059.04,-1543.79 ; R41.1@-3057.07,-1543.79 ccw(c-3085.56,-1515.31) -3045.27,-1515.31 ccw(c-3004.99,-1515.31) R41.1@-3033.48,-1543.79 ; R41.1@-3054.8,-1563.15 ccw(c-3073.04,-1581.39) -3073.04,-1555.59 ccw(c-3073.04,-1529.79) R41.1@-3054.8,-1548.03 ; R41.1@-3052.83,-1548.03 ccw(c-3071.07,-1529.79) -3045.27,-1529.79 ccw(c-3019.48,-1529.79) R41.1@-3037.72,-1548.03 ; v1@-3050.11,-1510.89 cw(c-3061.79,-1522.57) -3045.27,-1522.57 cw(c-3028.76,-1522.57) v1@-3040.44,-1510.89 ; v1(-3045.27,-1506.05) R41.1@-3045.27,-1555.59 -3247.59,-1555.59 -3262,-1570 -3262,-1864 -3274.59,-1876.59 -3425.81,-1876.59 -3434.68,-1867.72 ; R55.1@-2957.07,-947.39 cw(c-2985.56,-975.87) -2945.27,-975.87 cw(c-2904.99,-975.87) R55.1@-2933.48,-947.39 ; R55.1@-2952.83,-943.15 cw(c-2971.07,-961.39) -2945.27,-961.39 cw(c-2919.48,-961.39) R55.1@-2937.72,-943.15 ; R55.1@-2945.27,-935.59 -2945.27,-985.13 -2935.81,-994.59 -2886.81,-994.59 -2878.35,-1003.05 C43.2@-2878.35,-1055.59 C44.2@-2878.35,-1175.59 v1(-2878.35,-1360.13) ; C44.2@-2890.14,-1187.39 cw(c-2918.63,-1215.87) -2878.35,-1215.87 cw(c-2838.06,-1215.87) C44.2@-2866.55,-1187.39 ; C44.2@-2890.14,-1163.79 ccw(c-2918.63,-1135.31) -2878.35,-1135.31 ccw(c-2838.06,-1135.31) C44.2@-2866.55,-1163.79 ; C43.2@-2890.14,-1067.39 cw(c-2918.63,-1095.87) -2878.35,-1095.87 cw(c-2838.06,-1095.87) C43.2@-2866.55,-1067.39 ; C43.2@-2890.14,-1043.79 ccw(c-2918.63,-1015.31) -2878.35,-1015.31 ccw(c-2838.06,-1015.31) C43.2@-2866.55,-1043.79 ; C44.2@-2885.9,-1183.15 cw(c-2904.14,-1201.39) -2878.35,-1201.39 cw(c-2852.55,-1201.39) C44.2@-2870.79,-1183.15 ; C44.2@-2885.9,-1168.03 ccw(c-2904.14,-1149.79) -2878.35,-1149.79 ccw(c-2852.55,-1149.79) C44.2@-2870.79,-1168.03 ; C43.2@-2885.9,-1063.15 cw(c-2904.14,-1081.39) -2878.35,-1081.39 cw(c-2852.55,-1081.39) C43.2@-2870.79,-1063.15 ; C43.2@-2885.9,-1048.03 ccw(c-2904.14,-1029.79) -2878.35,-1029.79 ccw(c-2852.55,-1029.79) C43.2@-2870.79,-1048.03 ; v1@-2883.18,-1355.29 ccw(c-2894.86,-1343.61) -2878.35,-1343.61 ccw(c-2861.83,-1343.61) v1@-2873.51,-1355.29 ; R28.1@-2797.07,-2867.39 cw(c-2825.56,-2895.87) -2785.27,-2895.87 cw(c-2744.99,-2895.87) R28.1@-2773.48,-2867.39 ; R28.1@-2792.83,-2863.15 cw(c-2811.07,-2881.39) -2785.27,-2881.39 cw(c-2759.48,-2881.39) R28.1@-2777.72,-2863.15 ; v1(-2789.81,-1570.59) U9.4@-2686.3,-1570.59 ; R28.1@-2785.27,-2855.59 -2785.27,-2905.13 -2776.81,-2913.59 v1(-2507.81,-2913.59) ; v1@-2784.97,-1575.43 cw(c-2773.29,-1587.11) -2773.29,-1570.59 cw(c-2773.29,-1554.07) v1@-2784.97,-1565.75 ; U9.4@-2724.02,-1576.82 ccw(c-2739.07,-1591.86) -2739.07,-1570.59 ccw(c-2739.07,-1549.32) U9.4@-2724.02,-1564.36 ; v1@-2671.91,-3567.17 ccw(c-2683.59,-3578.85) -2683.59,-3562.33 ccw(c-2683.59,-3545.81) v1@-2671.91,-3557.49 ; Debug.4@-2661.97,-4634.79 ccw(c-2691.13,-4663.95) -2691.13,-4622.72 ccw(c-2691.13,-4581.48) Debug.4@-2661.97,-4610.64 ; Debug.4@-2657.73,-4630.55 ccw(c-2676.64,-4649.46) -2676.64,-4622.72 ccw(c-2676.64,-4595.97) Debug.4@-2657.73,-4614.88 ; Debug.4@-2564.11,-4630.55 cw(c-2545.2,-4649.46) -2545.2,-4622.72 cw(c-2545.2,-4595.97) Debug.4@-2564.11,-4614.88 ; Debug.4@-2559.87,-4634.79 cw(c-2530.71,-4663.95) -2530.71,-4622.72 cw(c-2530.71,-4581.48) Debug.4@-2559.87,-4610.64 ; v1@-2512.65,-2918.43 ccw(c-2524.33,-2930.11) -2524.33,-2913.59 ccw(c-2524.33,-2897.07) v1@-2512.65,-2908.75 ; C3.2@-2418.35,-3475.59 -2262.81,-3475.59 -2176.07,-3562.33 v1(-2153.81,-3562.33) LED.4@-1331.58,-3562.33 -1276.07,-3562.33 -1260.81,-3577.59 -1260.81,-3647.59 -1274.05,-3660.83 LED.2@-1331.58,-3660.83 ; R32.1@-2418.35,-3115.59 -2370.81,-3115.59 -2362.81,-3107.59 -2362.81,-3004.59 -2353.81,-2995.59 R35.2@-2245.27,-2995.59 v1(-2245.27,-2913.59) C34.1@-2245.27,-2855.59 ; C3.2@-2408.82,-3483.15 cw(c-2390.58,-3501.39) -2390.58,-3475.59 cw(c-2390.58,-3449.79) C3.2@-2408.82,-3468.03 ; R32.1@-2408.82,-3123.15 cw(c-2390.58,-3141.39) -2390.58,-3115.59 cw(c-2390.58,-3089.79) R32.1@-2408.82,-3108.03 ; C3.2@-2404.58,-3487.39 cw(c-2376.1,-3515.87) -2376.1,-3475.59 cw(c-2376.1,-3435.31) C3.2@-2404.58,-3463.79 ; R32.1@-2404.58,-3127.39 cw(c-2376.1,-3155.87) -2376.1,-3115.59 cw(c-2376.1,-3075.31) R32.1@-2404.58,-3103.79 ; R35.2@-2259.04,-3007.39 ccw(c-2287.52,-3035.87) -2287.52,-2995.59 ccw(c-2287.52,-2955.31) R35.2@-2259.04,-2983.79 ; R35.2@-2257.07,-2983.79 ccw(c-2285.56,-2955.31) -2245.27,-2955.31 ccw(c-2204.99,-2955.31) R35.2@-2233.48,-2983.79 ; C34.1@-2257.07,-2867.39 cw(c-2285.56,-2895.87) -2245.27,-2895.87 cw(c-2204.99,-2895.87) C34.1@-2233.48,-2867.39 ; R35.2@-2254.8,-3003.15 ccw(c-2273.04,-3021.39) -2273.04,-2995.59 ccw(c-2273.04,-2969.79) R35.2@-2254.8,-2988.03 ; R35.2@-2252.83,-2988.03 ccw(c-2271.07,-2969.79) -2245.27,-2969.79 ccw(c-2219.48,-2969.79) R35.2@-2237.72,-2988.03 ; C34.1@-2252.83,-2863.15 cw(c-2271.07,-2881.39) -2245.27,-2881.39 cw(c-2219.48,-2881.39) C34.1@-2237.72,-2863.15 ; v1@-2250.11,-2918.43 cw(c-2261.79,-2930.11) -2245.27,-2930.11 cw(c-2228.76,-2930.11) v1@-2240.44,-2918.43 ; v1@-2250.11,-2908.75 ccw(c-2261.79,-2897.07) -2245.27,-2897.07 ccw(c-2228.76,-2897.07) v1@-2240.44,-2908.75 ; P3.4@-2222.89,-2295.95 ccw(c-2252.04,-2266.79) -2210.81,-2266.79 ccw(c-2169.58,-2266.79) P3.4@-2198.73,-2295.95 ; P3.4@-2218.64,-2300.19 ccw(c-2237.56,-2281.28) -2210.81,-2281.28 ccw(c-2184.06,-2281.28) P3.4@-2202.98,-2300.19 ; R50.1@-2217.07,-1567.39 cw(c-2245.56,-1595.87) -2205.27,-1595.87 cw(c-2164.99,-1595.87) R50.1@-2193.48,-1567.39 ; R50.1@-2217.07,-1543.79 ccw(c-2245.56,-1515.31) -2205.27,-1515.31 ccw(c-2164.99,-1515.31) R50.1@-2193.48,-1543.79 ; R50.1@-2212.83,-1563.15 cw(c-2231.07,-1581.39) -2205.27,-1581.39 cw(c-2179.48,-1581.39) R50.1@-2197.72,-1563.15 ; R50.1@-2212.83,-1548.03 ccw(c-2231.07,-1529.79) -2205.27,-1529.79 ccw(c-2179.48,-1529.79) R50.1@-2197.72,-1548.03 ; v1@-2210.11,-1615.75 ccw(c-2221.79,-1604.07) -2205.27,-1604.07 ccw(c-2188.76,-1604.07) v1@-2200.44,-1615.75 ; v1(-2205.27,-1620.59) R50.1@-2205.27,-1555.59 -2205.27,-1508.05 -2193.81,-1496.59 -2148.81,-1496.59 -2138.35,-1486.13 C37.2@-2138.35,-1435.59 C41.2@-2138.35,-1315.59 -2138.35,-1191.13 -2122.81,-1175.59 C46.2@-2005.27,-1175.59 ; P3.4@-2202.98,-2354.83 cw(c-2184.06,-2373.75) -2184.06,-2347 cw(c-2184.06,-2320.25) P3.4@-2202.98,-2339.17 ; P3.4@-2198.73,-2359.08 cw(c-2169.58,-2388.23) -2169.58,-2347 cw(c-2169.58,-2305.77) P3.4@-2198.73,-2334.92 ; v1@-2158.65,-3567.17 ccw(c-2170.33,-3578.85) -2170.33,-3562.33 ccw(c-2170.33,-3545.81) v1@-2158.65,-3557.49 ; C38.1@-2150.14,-2047.39 cw(c-2178.63,-2075.87) -2138.35,-2075.87 cw(c-2098.06,-2075.87) C38.1@-2126.55,-2047.39 ; C38.1@-2150.14,-2023.79 ccw(c-2178.63,-1995.31) -2138.35,-1995.31 ccw(c-2098.06,-1995.31) C38.1@-2126.55,-2023.79 ; C42.1@-2150.14,-1927.39 cw(c-2178.63,-1955.87) -2138.35,-1955.87 cw(c-2098.06,-1955.87) C42.1@-2126.55,-1927.39 ; C42.1@-2150.14,-1903.79 ccw(c-2178.63,-1875.31) -2138.35,-1875.31 ccw(c-2098.06,-1875.31) C42.1@-2126.55,-1903.79 ; C40.1@-2150.14,-1807.39 cw(c-2178.63,-1835.87) -2138.35,-1835.87 cw(c-2098.06,-1835.87) C40.1@-2126.55,-1807.39 ; C37.2@-2150.14,-1447.39 cw(c-2178.63,-1475.87) -2138.35,-1475.87 cw(c-2098.06,-1475.87) C37.2@-2126.55,-1447.39 ; C37.2@-2150.14,-1423.79 ccw(c-2178.63,-1395.31) -2138.35,-1395.31 ccw(c-2098.06,-1395.31) C37.2@-2126.55,-1423.79 ; C41.2@-2150.14,-1327.39 cw(c-2178.63,-1355.87) -2138.35,-1355.87 cw(c-2098.06,-1355.87) C41.2@-2126.55,-1327.39 ; C41.2@-2150.14,-1303.79 ccw(c-2178.63,-1275.31) -2138.35,-1275.31 ccw(c-2098.06,-1275.31) C41.2@-2126.55,-1303.79 ; v1@-2148.97,-3567.17 cw(c-2137.29,-3578.85) -2137.29,-3562.33 cw(c-2137.29,-3545.81) v1@-2148.97,-3557.49 ; C38.1@-2145.9,-2043.15 cw(c-2164.14,-2061.39) -2138.35,-2061.39 cw(c-2112.55,-2061.39) C38.1@-2130.79,-2043.15 ; C38.1@-2145.9,-2028.03 ccw(c-2164.14,-2009.79) -2138.35,-2009.79 ccw(c-2112.55,-2009.79) C38.1@-2130.79,-2028.03 ; C42.1@-2145.9,-1923.15 cw(c-2164.14,-1941.39) -2138.35,-1941.39 cw(c-2112.55,-1941.39) C42.1@-2130.79,-1923.15 ; C42.1@-2145.9,-1908.03 ccw(c-2164.14,-1889.79) -2138.35,-1889.79 ccw(c-2112.55,-1889.79) C42.1@-2130.79,-1908.03 ; C40.1@-2145.9,-1803.15 cw(c-2164.14,-1821.39) -2138.35,-1821.39 cw(c-2112.55,-1821.39) C40.1@-2130.79,-1803.15 ; C37.2@-2145.9,-1443.15 cw(c-2164.14,-1461.39) -2138.35,-1461.39 cw(c-2112.55,-1461.39) C37.2@-2130.79,-1443.15 ; C37.2@-2145.9,-1428.03 ccw(c-2164.14,-1409.79) -2138.35,-1409.79 ccw(c-2112.55,-1409.79) C37.2@-2130.79,-1428.03 ; C41.2@-2145.9,-1323.15 cw(c-2164.14,-1341.39) -2138.35,-1341.39 cw(c-2112.55,-1341.39) C41.2@-2130.79,-1323.15 ; C41.2@-2145.9,-1308.03 ccw(c-2164.14,-1289.79) -2138.35,-1289.79 ccw(c-2112.55,-1289.79) C41.2@-2130.79,-1308.03 ; C40.1@-2128.82,-1803.15 cw(c-2110.58,-1821.39) -2110.58,-1795.59 cw(c-2110.58,-1769.79) C40.1@-2128.82,-1788.03 ; C40.1@-2124.58,-1807.39 cw(c-2096.1,-1835.87) -2096.1,-1795.59 cw(c-2096.1,-1755.31) C40.1@-2124.58,-1783.79 ; v1@-2101.24,-2351.84 ccw(c-2112.92,-2363.52) -2112.92,-2347 ccw(c-2112.92,-2330.48) v1@-2101.24,-2342.16 ; v1(-2096.4,-2347) P3.4@-2210.81,-2347 -2210.81,-2182.59 -2200.81,-2172.59 -2147.81,-2172.59 -2138.35,-2163.13 C38.1@-2138.35,-2035.59 C42.1@-2138.35,-1915.59 C40.1@-2138.35,-1795.59 v1(-2065.81,-1795.59) ; v1@-2070.65,-1800.43 ccw(c-2082.33,-1812.11) -2082.33,-1795.59 ccw(c-2082.33,-1779.07) v1@-2070.65,-1790.75 ; C46.2@-2019.04,-1187.39 ccw(c-2047.52,-1215.87) -2047.52,-1175.59 ccw(c-2047.52,-1135.31) C46.2@-2019.04,-1163.79 ; C46.2@-2017.07,-1187.39 cw(c-2045.56,-1215.87) -2005.27,-1215.87 cw(c-1964.99,-1215.87) C46.2@-1993.48,-1187.39 ; C46.2@-2017.07,-1163.79 ccw(c-2045.56,-1135.31) -2005.27,-1135.31 ccw(c-1964.99,-1135.31) C46.2@-1993.48,-1163.79 ; C45.2@-2017.07,-1067.39 cw(c-2045.56,-1095.87) -2005.27,-1095.87 cw(c-1964.99,-1095.87) C45.2@-1993.48,-1067.39 ; C45.2@-2017.07,-1043.79 ccw(c-2045.56,-1015.31) -2005.27,-1015.31 ccw(c-1964.99,-1015.31) C45.2@-1993.48,-1043.79 ; C46.2@-2014.8,-1183.15 ccw(c-2033.04,-1201.39) -2033.04,-1175.59 ccw(c-2033.04,-1149.79) C46.2@-2014.8,-1168.03 ; C46.2@-2012.83,-1183.15 cw(c-2031.07,-1201.39) -2005.27,-1201.39 cw(c-1979.48,-1201.39) C46.2@-1997.72,-1183.15 ; C46.2@-2012.83,-1168.03 ccw(c-2031.07,-1149.79) -2005.27,-1149.79 ccw(c-1979.48,-1149.79) C46.2@-1997.72,-1168.03 ; C45.2@-2012.83,-1063.15 cw(c-2031.07,-1081.39) -2005.27,-1081.39 cw(c-1979.48,-1081.39) C45.2@-1997.72,-1063.15 ; C45.2@-2012.83,-1048.03 ccw(c-2031.07,-1029.79) -2005.27,-1029.79 ccw(c-1979.48,-1029.79) C45.2@-1997.72,-1048.03 ; R56.1@-1950.14,-947.39 cw(c-1978.63,-975.87) -1938.35,-975.87 cw(c-1898.06,-975.87) R56.1@-1926.55,-947.39 ; R56.1@-1945.9,-943.15 cw(c-1964.14,-961.39) -1938.35,-961.39 cw(c-1912.55,-961.39) R56.1@-1930.79,-943.15 ; R56.1@-1938.35,-935.59 -1938.35,-984.13 -1947.81,-993.59 -1993.81,-993.59 -2005.27,-1005.05 C45.2@-2005.27,-1055.59 C46.2@-2005.27,-1175.59 ; C47.2@-1865.07,-4823.79 ccw(c-1893.56,-4795.31) -1853.27,-4795.31 ccw(c-1812.99,-4795.31) C47.2@-1841.48,-4823.79 ; C47.2@-1860.83,-4828.03 ccw(c-1879.07,-4809.79) -1853.27,-4809.79 ccw(c-1827.48,-4809.79) C47.2@-1845.72,-4828.03 ; LCD.4@-1858.65,-4103.59 cw(c-1871.68,-4116.61) -1853.26,-4116.61 cw(c-1834.84,-4116.61) LCD.4@-1847.86,-4103.59 ; v1@-1858.11,-4617.88 cw(c-1869.79,-4606.2) -1869.79,-4622.72 cw(c-1869.79,-4639.24) -1858.11,-4627.55 cw(c-1869.79,-4639.24) -1853.27,-4639.24 cw(c-1836.76,-4639.24) v1@-1848.44,-4627.55 ; C47.2@-1853.27,-4835.59 v1(-1853.27,-4622.72) Debug.4@-2610.92,-4622.72 -3497.68,-4622.72 -3533.27,-4587.13 C2.2@-3533.27,-4416.59 C1.2@-3706.35,-4416.59 -3706.35,-4932.13 -3729.81,-4955.59 GND.2@-3893.7,-4955.59 GND.4@-3893.7,-5155.59 ; LCD.4@-1853.26,-4075.36 -1853.26,-4423.14 -1831.81,-4444.59 v1(-1494.51,-4444.59) KEY1.2@-1494.51,-4867.59 KEY1.2@-903.96,-4867.59 ; Q5.2@-1739.38,-2859.22 cw(c-1754.42,-2874.26) -1733.15,-2874.26 cw(c-1711.88,-2874.26) Q5.2@-1726.92,-2859.22 ; Q3.2@-1739.38,-2659.22 cw(c-1754.42,-2674.26) -1733.15,-2674.26 cw(c-1711.88,-2674.26) Q3.2@-1726.92,-2659.22 ; Q4.2@-1739.38,-2479.22 cw(c-1754.42,-2494.26) -1733.15,-2494.26 cw(c-1711.88,-2494.26) Q4.2@-1726.92,-2479.22 ; Q2.2@-1739.38,-2279.22 cw(c-1754.42,-2294.26) -1733.15,-2294.26 cw(c-1711.88,-2294.26) Q2.2@-1726.92,-2279.22 ; v1@-1737.99,-2918.43 cw(c-1749.67,-2930.11) -1733.15,-2930.11 cw(c-1716.63,-2930.11) v1@-1728.31,-2918.43 ; v1@-1737.99,-2908.75 ccw(c-1749.67,-2897.07) -1733.15,-2897.07 ccw(c-1716.63,-2897.07) v1@-1728.31,-2908.75 ; Q2.2@-1733.15,-2272.99 -1733.15,-2314.25 -1725.81,-2321.59 v1(-1690.81,-2321.59) -1690.81,-2466.59 -1697.21,-2472.99 Q4.2@-1733.15,-2472.99 -1733.15,-2509.25 -1726.81,-2515.59 -1698.81,-2515.59 -1690.81,-2523.59 -1690.81,-2646.59 -1697.21,-2652.99 Q3.2@-1733.15,-2652.99 -1733.15,-2701.25 -1725.81,-2708.59 -1696.81,-2708.59 -1689.81,-2715.59 -1689.81,-2845.59 -1697.21,-2852.99 Q5.2@-1733.15,-2852.99 -1733.15,-3167.25 -1718.81,-3181.59 R8.1@-1482.27,-3181.59 -1482.27,-2923.05 -1467.09,-2907.87 U3.15@-913.23,-2907.87 v1(-913.23,-3070.17) ; Q5.2@-1713.14,-2859.22 cw(c-1698.1,-2874.26) -1698.1,-2852.99 cw(c-1698.1,-2831.72) Q5.2@-1713.14,-2846.76 ; Q3.2@-1713.14,-2659.22 cw(c-1698.1,-2674.26) -1698.1,-2652.99 cw(c-1698.1,-2631.72) Q3.2@-1713.14,-2646.76 ; Q4.2@-1713.14,-2479.22 cw(c-1698.1,-2494.26) -1698.1,-2472.99 cw(c-1698.1,-2451.72) Q4.2@-1713.14,-2466.76 ; v1@-1695.65,-2316.75 cw(c-1707.33,-2305.07) -1707.33,-2321.59 cw(c-1707.33,-2338.11) -1695.65,-2326.43 cw(c-1707.33,-2338.11) -1690.81,-2338.11 cw(c-1674.29,-2338.11) v1@-1685.97,-2326.43 ; C27.1@-1602.07,-1789.39 cw(c-1630.56,-1817.87) -1590.27,-1817.87 cw(c-1549.99,-1817.87) C27.1@-1578.48,-1789.39 ; C27.1@-1602.07,-1765.79 ccw(c-1630.56,-1737.31) -1590.27,-1737.31 ccw(c-1549.99,-1737.31) C27.1@-1578.48,-1765.79 ; C27.1@-1597.83,-1785.15 cw(c-1616.07,-1803.39) -1590.27,-1803.39 cw(c-1564.48,-1803.39) C27.1@-1582.72,-1785.15 ; C27.1@-1597.83,-1770.03 ccw(c-1616.07,-1751.79) -1590.27,-1751.79 ccw(c-1564.48,-1751.79) C27.1@-1582.72,-1770.03 ; v1@-1587.65,-3567.17 ccw(c-1599.33,-3578.85) -1599.33,-3562.33 ccw(c-1599.33,-3545.81) v1@-1587.65,-3557.49 ; v1@-1577.97,-3567.17 cw(c-1566.29,-3578.85) -1566.29,-3562.33 cw(c-1566.29,-3545.81) v1@-1577.97,-3557.49 ; C29.1@-1535.14,-1669.39 cw(c-1563.63,-1697.87) -1523.35,-1697.87 cw(c-1483.06,-1697.87) C29.1@-1511.55,-1669.39 ; C31.2@-1535.14,-1405.79 ccw(c-1563.63,-1377.31) -1523.35,-1377.31 ccw(c-1483.06,-1377.31) C31.2@-1511.55,-1405.79 ; C30.2@-1535.14,-1309.39 cw(c-1563.63,-1337.87) -1523.35,-1337.87 cw(c-1483.06,-1337.87) C30.2@-1511.55,-1309.39 ; C30.2@-1535.14,-1285.79 ccw(c-1563.63,-1257.31) -1523.35,-1257.31 ccw(c-1483.06,-1257.31) C30.2@-1511.55,-1285.79 ; C29.1@-1530.9,-1665.15 cw(c-1549.14,-1683.39) -1523.35,-1683.39 cw(c-1497.55,-1683.39) C29.1@-1515.79,-1665.15 ; C31.2@-1530.9,-1410.03 ccw(c-1549.14,-1391.79) -1523.35,-1391.79 ccw(c-1497.55,-1391.79) C31.2@-1515.79,-1410.03 ; C30.2@-1530.9,-1305.15 cw(c-1549.14,-1323.39) -1523.35,-1323.39 cw(c-1497.55,-1323.39) C30.2@-1515.79,-1305.15 ; C30.2@-1530.9,-1290.03 ccw(c-1549.14,-1271.79) -1523.35,-1271.79 ccw(c-1497.55,-1271.79) C30.2@-1515.79,-1290.03 ; C29.1@-1513.82,-1665.15 cw(c-1495.58,-1683.39) -1495.58,-1657.59 cw(c-1495.58,-1631.79) C29.1@-1513.82,-1650.03 ; C31.2@-1513.82,-1425.15 cw(c-1495.58,-1443.39) -1495.58,-1417.59 cw(c-1495.58,-1391.79) C31.2@-1513.82,-1410.03 ; C30.2@-1513.82,-1305.15 cw(c-1495.58,-1323.39) -1495.58,-1297.59 cw(c-1495.58,-1271.79) C30.2@-1513.82,-1290.03 ; KEY1.2@-1513.27,-4848.83 ccw(c-1558.55,-4803.55) -1494.51,-4803.55 ccw(c-1430.47,-4803.55) KEY1.2@-1475.75,-4848.83 ; C29.1@-1509.58,-1669.39 cw(c-1481.1,-1697.87) -1481.1,-1657.59 cw(c-1481.1,-1617.31) C29.1@-1509.58,-1645.79 ; C31.2@-1509.58,-1429.39 cw(c-1481.1,-1457.87) -1481.1,-1417.59 cw(c-1481.1,-1377.31) C31.2@-1509.58,-1405.79 ; C30.2@-1509.58,-1309.39 cw(c-1481.1,-1337.87) -1481.1,-1297.59 cw(c-1481.1,-1257.31) C30.2@-1509.58,-1285.79 ; KEY1.2@-1509.03,-4853.07 ccw(c-1544.07,-4818.03) -1494.51,-4818.03 ccw(c-1444.95,-4818.03) KEY1.2@-1480,-4853.07 ; KEY1.2@-1504.78,-4857.32 ccw(c-1529.58,-4832.52) -1494.51,-4832.52 ccw(c-1459.44,-4832.52) KEY1.2@-1484.24,-4857.32 ; v1@-1499.35,-4439.75 cw(c-1511.03,-4428.07) -1511.03,-4444.59 cw(c-1511.03,-4461.11) -1499.35,-4449.43 cw(c-1511.03,-4461.11) -1494.51,-4461.11 cw(c-1477.99,-4461.11) v1@-1489.67,-4449.43 ; R8.1@-1496.04,-3193.39 ccw(c-1524.52,-3221.87) -1524.52,-3181.59 ccw(c-1524.52,-3141.31) R8.1@-1496.04,-3169.79 ; R8.1@-1494.07,-3169.79 ccw(c-1522.56,-3141.31) -1482.27,-3141.31 ccw(c-1441.99,-3141.31) R8.1@-1470.48,-3169.79 ; R8.1@-1491.8,-3189.15 ccw(c-1510.04,-3207.39) -1510.04,-3181.59 ccw(c-1510.04,-3155.79) R8.1@-1491.8,-3174.03 ; R8.1@-1489.83,-3174.03 ccw(c-1508.07,-3155.79) -1482.27,-3155.79 ccw(c-1456.48,-3155.79) R8.1@-1474.72,-3174.03 ; KEY1.2@-1454.71,-4877.86 cw(c-1429.91,-4902.66) -1429.91,-4867.59 cw(c-1429.91,-4832.52) KEY1.2@-1454.71,-4857.32 ; KEY1.2@-1450.47,-4882.11 cw(c-1415.43,-4917.15) -1415.43,-4867.59 cw(c-1415.43,-4818.03) KEY1.2@-1450.47,-4853.07 ; U2.1@-1447.04,-307.08 ccw(c-1476.19,-336.23) -1476.19,-295 ccw(c-1476.19,-253.77) U2.1@-1447.04,-282.92 ; KEY1.2@-1446.23,-4886.35 cw(c-1400.94,-4931.63) -1400.94,-4867.59 cw(c-1400.94,-4803.55) KEY1.2@-1446.23,-4848.83 ; U2.1@-1442.79,-302.83 ccw(c-1461.71,-321.75) -1461.71,-295 ccw(c-1461.71,-268.25) U2.1@-1442.79,-287.17 ; U2.1@-1408.06,-307.08 cw(c-1437.22,-336.23) -1395.98,-336.23 cw(c-1354.75,-336.23) U2.1@-1383.91,-307.08 ; U2.1@-1403.82,-302.83 cw(c-1422.73,-321.75) -1395.98,-321.75 cw(c-1369.24,-321.75) U2.1@-1388.15,-302.83 ; U2.1@-1394.98,-294 U2.7@-603.35,-294 ; C36.2@-1380.14,-1969.79 ccw(c-1408.63,-1941.31) -1368.35,-1941.31 ccw(c-1328.06,-1941.31) C36.2@-1356.55,-1969.79 ; C36.2@-1375.9,-1974.03 ccw(c-1394.14,-1955.79) -1368.35,-1955.79 ccw(c-1342.55,-1955.79) C36.2@-1360.79,-1974.03 ; C36.2@-1368.35,-1981.59 -1368.35,-1903.05 -1379.81,-1891.59 -1572.81,-1891.59 -1590.27,-1874.13 C27.1@-1590.27,-1777.59 -1590.27,-1729.05 -1583.81,-1722.59 -1531.81,-1722.59 -1523.35,-1714.13 C29.1@-1523.35,-1657.59 -1470.81,-1657.59 -1460.81,-1647.59 -1460.81,-1427.59 -1470.81,-1417.59 C31.2@-1523.35,-1417.59 C30.2@-1523.35,-1297.59 ; LED.4@-1359.81,-3567.73 ccw(c-1372.83,-3580.75) -1372.83,-3562.33 ccw(c-1372.83,-3543.91) LED.4@-1359.81,-3556.94 ; U2.1@-1349.17,-302.83 cw(c-1327.85,-324.16) -1327.85,-294 ; U2.1@-1349.17,-287.17 ccw(c-1332.68,-270.67) -1332.68,-294 ; U2.1@-1344.93,-307.08 cw(c-1313.36,-338.65) -1313.36,-294 ; U2.1@-1344.93,-282.92 ccw(c-1318.19,-256.18) -1318.19,-294 ; U2.2@-1328.93,-407.08 ccw(c-1358.08,-436.23) -1358.08,-395 ccw(c-1358.08,-353.77) U2.2@-1328.93,-382.92 ; U2.2@-1324.68,-402.83 ccw(c-1343.6,-421.75) -1343.6,-395 ccw(c-1343.6,-368.25) U2.2@-1324.68,-387.17 ; LED.2@-1303.35,-3666.22 cw(c-1290.33,-3679.25) -1290.33,-3660.83 cw(c-1290.33,-3642.41) LED.2@-1303.35,-3655.43 ; LED.4@-1303.35,-3567.73 cw(c-1290.33,-3580.75) -1290.33,-3562.33 cw(c-1290.33,-3543.91) LED.4@-1303.35,-3556.94 ; U2.2@-1231.06,-402.83 cw(c-1212.15,-421.75) -1212.15,-395 cw(c-1212.15,-368.25) U2.2@-1231.06,-387.17 ; KEY.6@-1229.88,-4106.59 cw(c-1242.91,-4119.61) -1224.49,-4119.61 cw(c-1206.07,-4119.61) KEY.6@-1219.09,-4106.59 ; KEY.6@-1229.88,-4050.13 ccw(c-1242.91,-4037.11) -1224.49,-4037.11 ccw(c-1206.07,-4037.11) KEY.6@-1219.09,-4050.13 ; U2.2@-1226.82,-407.08 cw(c-1197.67,-436.23) -1197.67,-395 cw(c-1197.67,-353.77) U2.2@-1226.82,-382.92 ; C28.2@-1195.14,-1285.79 ccw(c-1223.63,-1257.31) -1183.35,-1257.31 ccw(c-1143.06,-1257.31) C28.2@-1171.55,-1285.79 ; C28.2@-1190.9,-1290.03 ccw(c-1209.14,-1271.79) -1183.35,-1271.79 ccw(c-1157.55,-1271.79) C28.2@-1175.79,-1290.03 ; C28.2@-1173.82,-1305.15 cw(c-1155.58,-1323.39) -1155.58,-1297.59 cw(c-1155.58,-1271.79) C28.2@-1173.82,-1290.03 ; C28.2@-1169.58,-1309.39 cw(c-1141.1,-1337.87) -1141.1,-1297.59 cw(c-1141.1,-1257.31) C28.2@-1169.58,-1285.79 ; v1@-1005.84,-3840.43 cw(c-1017.52,-3852.11) -1001,-3852.11 cw(c-984.48,-3852.11) v1@-996.16,-3840.43 ; v1(-1001,-3835.59) -1001,-3936 -1021.59,-3956.59 -1210.81,-3956.59 -1224.49,-3970.27 KEY.6@-1224.49,-4078.36 -1224.49,-4351.91 -1205.81,-4370.59 -933.81,-4370.59 -903.96,-4400.44 KEY1.2@-903.96,-4867.59 ; KEY1.2@-952.24,-4886.35 ccw(c-997.53,-4931.63) -997.53,-4867.59 ccw(c-997.53,-4803.55) KEY1.2@-952.24,-4848.83 ; KEY1.2@-948,-4882.11 ccw(c-983.05,-4917.15) -983.05,-4867.59 ccw(c-983.05,-4818.03) KEY1.2@-948,-4853.07 ; KEY1.2@-943.76,-4877.86 ccw(c-968.56,-4902.66) -968.56,-4867.59 ccw(c-968.56,-4832.52) KEY1.2@-943.76,-4857.32 ; U3.15@-925.03,-2943.29 cw(c-953.51,-2971.78) -913.23,-2971.78 cw(c-872.95,-2971.78) U3.15@-901.43,-2943.29 ; U3.15@-925.03,-2919.67 ccw(c-953.51,-2948.16) -953.51,-2907.87 ccw(c-953.51,-2867.59) U3.15@-925.03,-2896.08 ; KEY1.2@-922.72,-4848.83 ccw(c-968,-4803.55) -903.96,-4803.55 ccw(c-839.92,-4803.55) KEY1.2@-885.2,-4848.83 ; U3.15@-920.78,-2939.05 cw(c-939.02,-2957.29) -913.23,-2957.29 cw(c-887.43,-2957.29) U3.15@-905.67,-2939.05 ; U3.15@-920.78,-2915.43 ccw(c-939.02,-2933.67) -939.02,-2907.87 ccw(c-939.02,-2882.08) U3.15@-920.78,-2900.32 ; KEY1.2@-918.47,-4853.07 ccw(c-953.52,-4818.03) -903.96,-4818.03 ccw(c-854.4,-4818.03) KEY1.2@-889.44,-4853.07 ; v1@-918.07,-3065.33 ccw(c-929.75,-3053.65) -913.23,-3053.65 ccw(c-896.71,-3053.65) v1@-908.39,-3065.33 ; KEY1.2@-914.23,-4857.32 ccw(c-939.03,-4832.52) -903.96,-4832.52 ccw(c-868.89,-4832.52) KEY1.2@-893.69,-4857.32 ; v1(-913.23,-3434.59) MODIF.8@-777.58,-3434.59 ; v1@-908.39,-3439.43 cw(c-896.71,-3451.11) -896.71,-3434.59 cw(c-896.71,-3418.07) v1@-908.39,-3429.75 ; KEY1.2@-855.87,-4876.35 cw(c-842.06,-4882.86) -842.06,-4867.59 cw(c-842.06,-4852.32) KEY1.2@-855.87,-4858.83 ; KEY1.2@-850.44,-4878.91 cw(c-832.59,-4887.32) -832.59,-4867.59